# EAGLE board cpc_ram1m_74_v1.00 (EAGLE 6.4)
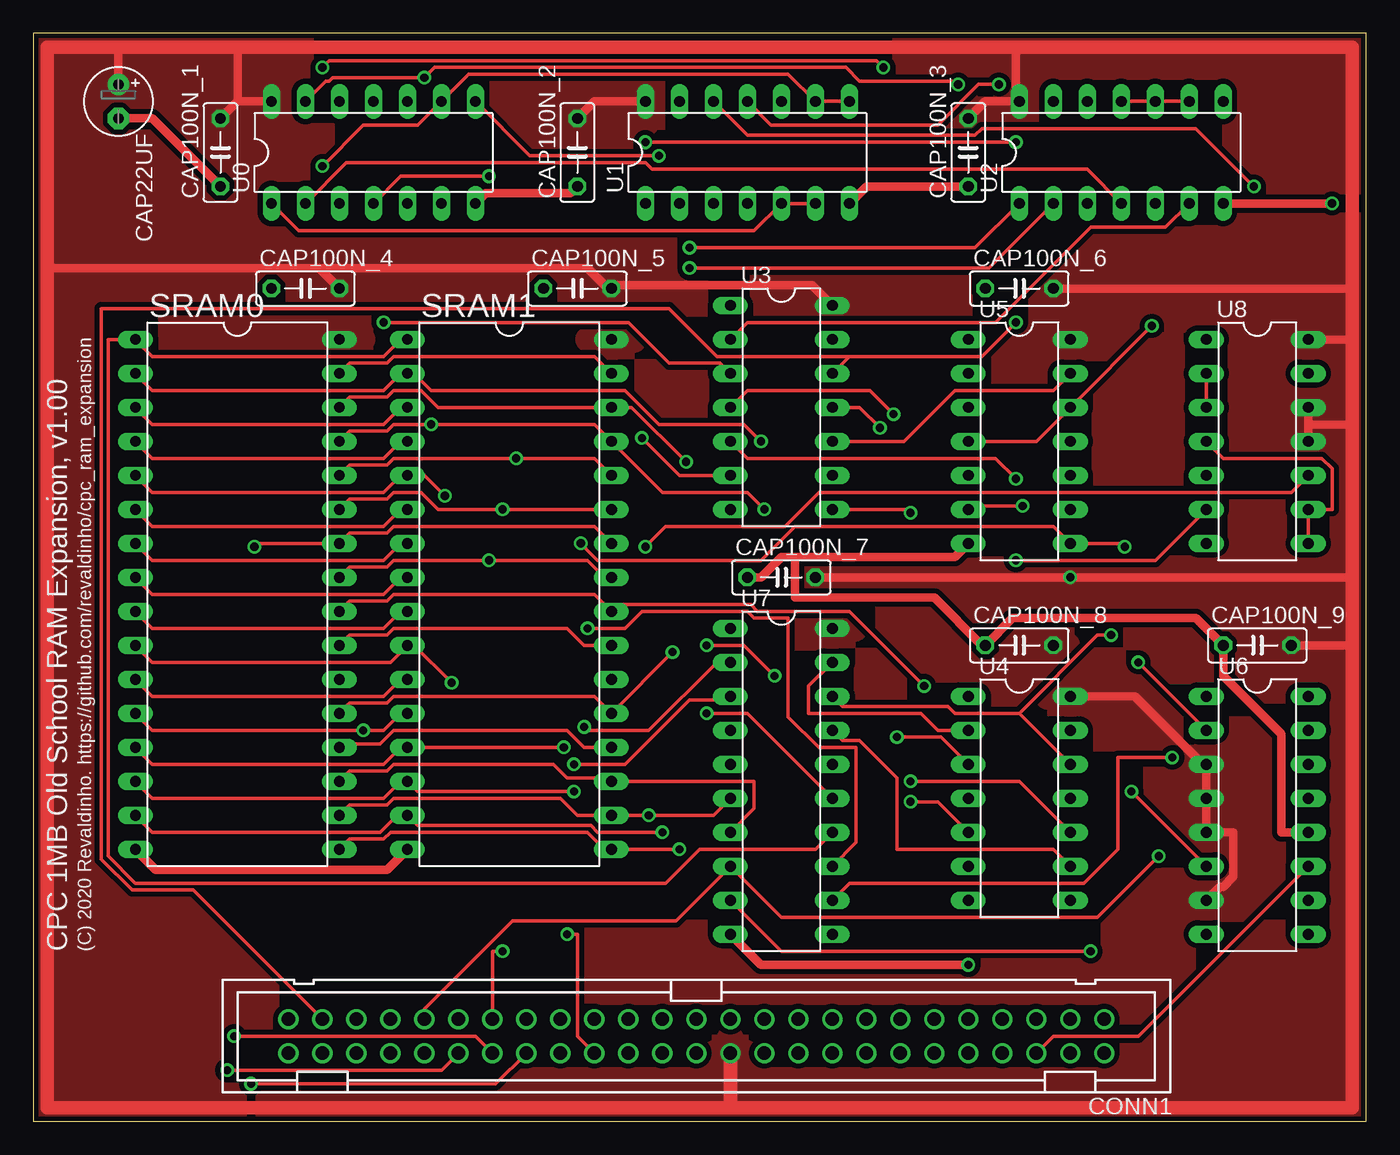
[diagram p0: board, top side]
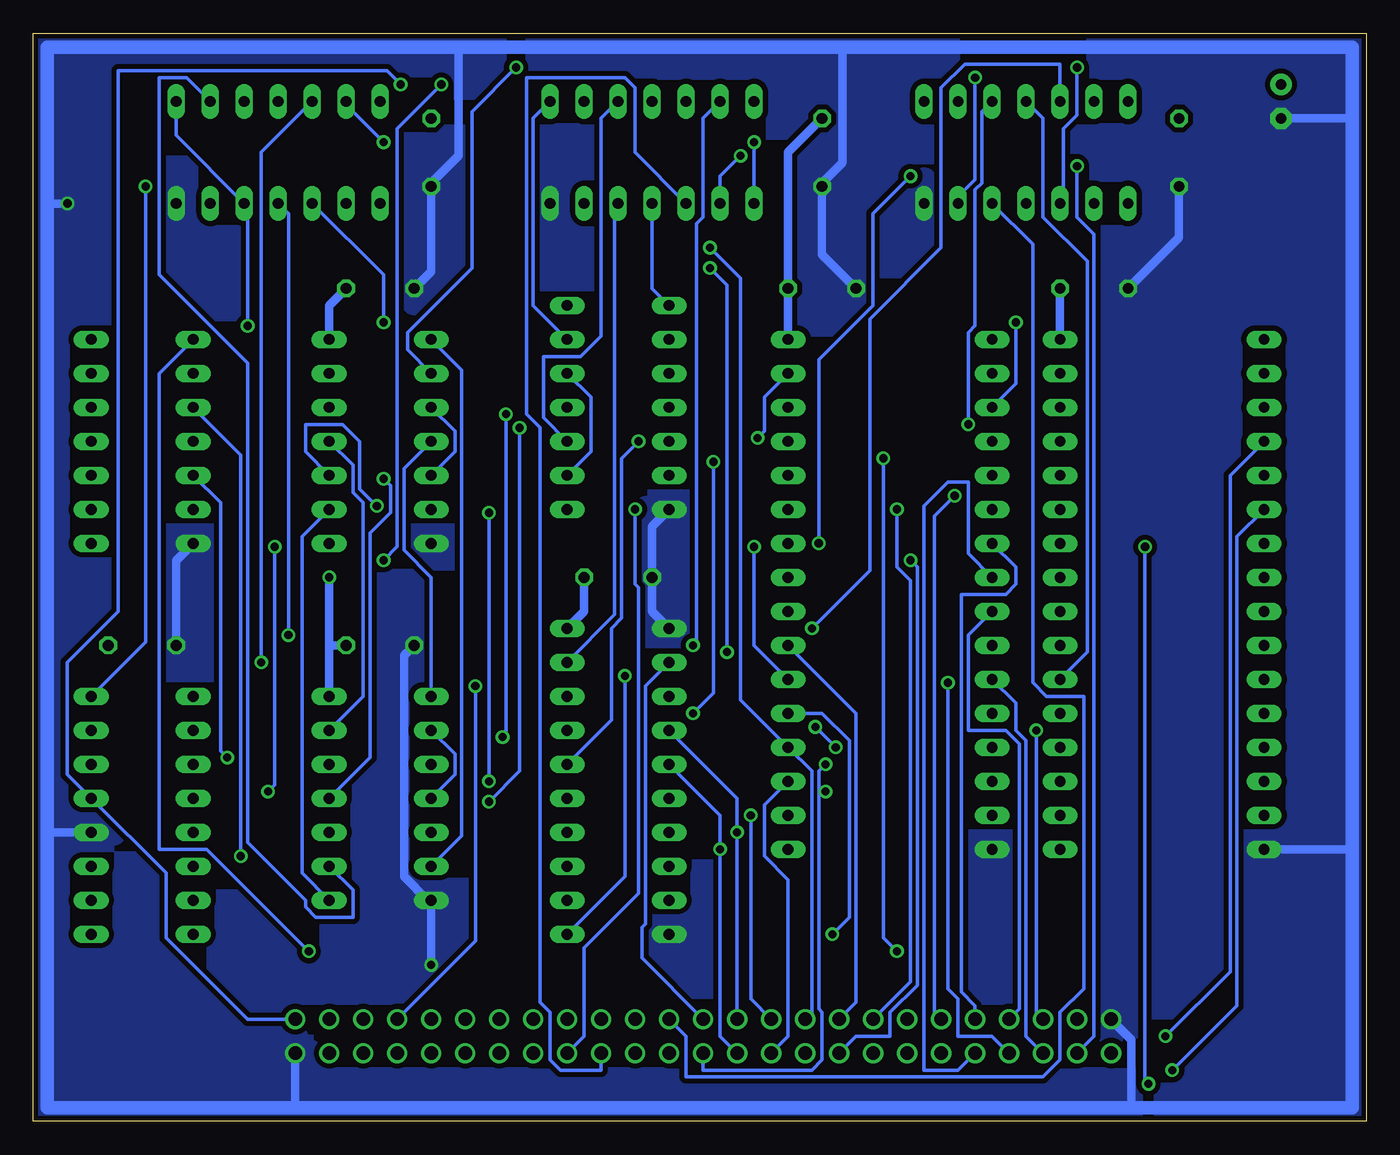
[diagram p1: board, bottom side, seen from below]

Size 99.57 x 81.28 mm. Coordinates in mm from the lower left corner, seen from the top.
Outline: 0,0 99.57,0 99.57,81.28 0,81.28 0,0
Copper layers (1*16): Top 0.035mm / dielectric 1.5mm / Bottom 0.035mm
Design rules "design_rules": minimum track width 10mil, minimum drill 24mil, track to track 8mil, track to pad 8mil, pad to pad 12mil, via to via 15mil, smd to smd 8mil, copper to edge 15mil, drill to drill 10mil, minimum pad ring 10mil, minimum via ring 8mil, stop-mask expansion 4mil, vias tented up to drill 0mil, thermal gap 10mil
Net classes: 0 signal: width 0.254 mm, clearance 0.254 mm; 1 supply: width 0.635 mm, clearance 0.381 mm

## Footprints (pad centres in the part's own frame; a part is rotated, then mirrored left to right if it is on the bottom)
E2,5-5 = drill 0.813 pad 1.6: + -1.27,0 | drill 0.813 pad 1.6 octagon: - 1.27,0
C050-025X075 = drill 0.813 octagon: 1 -2.54,0; 2 2.54,0
PAK100/2500-50 = drill 1 pad 1.422: 1 -30.48,-1.27; 2 -30.48,1.27; 3 -27.94,-1.27; 4 -27.94,1.27; 5 -25.4,-1.27; 6 -25.4,1.27; 7 -22.86,-1.27; 8 -22.86,1.27; 9 -20.32,-1.27; 10 -20.32,1.27; 11 -17.78,-1.27; 12 -17.78,1.27; 13 -15.24,-1.27; 14 -15.24,1.27; 15 -12.7,-1.27; 16 -12.7,1.27; 17 -10.16,-1.27; 18 -10.16,1.27; 19 -7.62,-1.27; 20 -7.62,1.27; 21 -5.08,-1.27; 22 -5.08,1.27; 23 -2.54,-1.27; 24 -2.54,1.27; 25 0,-1.27; 26 0,1.27; 27 2.54,-1.27; 28 2.54,1.27; 29 5.08,-1.27; 30 5.08,1.27; 31 7.62,-1.27; 32 7.62,1.27; 33 10.16,-1.27; 34 10.16,1.27; 35 12.7,-1.27; 36 12.7,1.27; 37 15.24,-1.27; 38 15.24,1.27; 39 17.78,-1.27; 40 17.78,1.27; 41 20.32,-1.27; 42 20.32,1.27; 43 22.86,-1.27; 44 22.86,1.27; 45 25.4,-1.27; 46 25.4,1.27; 47 27.94,-1.27; 48 27.94,1.27; 49 30.48,-1.27; 50 30.48,1.27
DIL32 = drill 0.813 long: 1 -19.05,-7.62; 2 -16.51,-7.62; 3 -13.97,-7.62; 4 -11.43,-7.62; 5 -8.89,-7.62; 6 -6.35,-7.62; 7 -3.81,-7.62; 8 -1.27,-7.62; 9 1.27,-7.62; 10 3.81,-7.62; 11 6.35,-7.62; 12 8.89,-7.62; 13 11.43,-7.62; 14 13.97,-7.62; 15 16.51,-7.62; 16 19.05,-7.62; 17 19.05,7.62; 18 16.51,7.62; 19 13.97,7.62; 20 11.43,7.62; 21 8.89,7.62; 22 6.35,7.62; 23 3.81,7.62; 24 1.27,7.62; 25 -1.27,7.62; 26 -3.81,7.62; 27 -6.35,7.62; 28 -8.89,7.62; 29 -11.43,7.62; 30 -13.97,7.62; 31 -16.51,7.62; 32 -19.05,7.62
DIL14 = drill 0.813 long: 1 -7.62,-3.81; 2 -5.08,-3.81; 3 -2.54,-3.81; 4 0,-3.81; 5 2.54,-3.81; 6 5.08,-3.81; 7 7.62,-3.81; 8 7.62,3.81; 9 5.08,3.81; 10 2.54,3.81; 11 0,3.81; 12 -2.54,3.81; 13 -5.08,3.81; 14 -7.62,3.81
DIL16 = drill 0.813 long: 1 -8.89,-3.81; 2 -6.35,-3.81; 3 -3.81,-3.81; 4 -1.27,-3.81; 5 1.27,-3.81; 6 3.81,-3.81; 7 6.35,-3.81; 8 8.89,-3.81; 9 8.89,3.81; 10 6.35,3.81; 11 3.81,3.81; 12 1.27,3.81; 13 -1.27,3.81; 14 -3.81,3.81; 15 -6.35,3.81; 16 -8.89,3.81
DIL20 = drill 0.813 long: 1 -11.43,-3.81; 2 -8.89,-3.81; 3 -6.35,-3.81; 4 -3.81,-3.81; 5 -1.27,-3.81; 6 1.27,-3.81; 7 3.81,-3.81; 8 6.35,-3.81; 9 8.89,-3.81; 10 11.43,-3.81; 11 11.43,3.81; 12 8.89,3.81; 13 6.35,3.81; 14 3.81,3.81; 15 1.27,3.81; 16 -1.27,3.81; 17 -3.81,3.81; 18 -6.35,3.81; 19 -8.89,3.81; 20 -11.43,3.81

## Placement (x,y rotation side)
CAP22UF  [E2,5-5]  6.35,76.2 270 top
CAP100N_1  [C050-025X075]  13.97,72.39 90 top
CAP100N_2  [C050-025X075]  40.64,72.39 90 top
CAP100N_3  [C050-025X075]  69.85,72.39 90 top
CAP100N_4  [C050-025X075]  20.32,62.23 0 top
CAP100N_5  [C050-025X075]  40.64,62.23 0 top
CAP100N_6  [C050-025X075]  73.66,62.23 0 top
CAP100N_7  [C050-025X075]  55.88,40.64 0 top
CAP100N_8  [C050-025X075]  73.66,35.56 0 top
CAP100N_9  [C050-025X075]  91.44,35.56 0 top
CONN1  [PAK100/2500-50]  49.53,6.35 180 top
SRAM0  [DIL32]  15.24,39.37 270 top
SRAM1  [DIL32]  35.56,39.37 270 top
U0  [DIL14]  25.4,72.39 0 top
U1  [DIL14]  53.34,72.39 0 top
U2  [DIL14]  81.28,72.39 0 top
U3  [DIL14]  55.88,53.34 270 top
U4  [DIL14]  73.66,24.13 270 top
U5  [DIL14]  73.66,50.8 270 top
U6  [DIL16]  91.44,22.86 270 top
U7  [DIL20]  55.88,25.4 270 top
U8  [DIL14]  91.44,50.8 270 top

## Library data of the parts
CAP22UF CAP100N_1-CAP100N_9 = resistor
CONN1 = con-3m
SRAM0 SRAM1 U0 U1-U8 = ic-package

## Nets
A0: CONN1.33 SRAM0.23 SRAM1.23
A1: CONN1.34 SRAM0.25 SRAM1.25
A2: CONN1.35 SRAM0.27 SRAM1.27
A3: CONN1.36 SRAM0.26 SRAM1.26
A4: CONN1.37 SRAM0.28 SRAM1.28
A5: CONN1.38 SRAM0.4 SRAM1.4
A6: CONN1.39 SRAM0.5 SRAM1.5
A7: CONN1.40 SRAM0.6 SRAM1.6
A8: CONN1.41 SRAM0.7 SRAM1.7 U7.8 U8.2 U8.3
A8_B: U7.9 U8.1
A8_Q: U0.12 U7.13
A8_QB: U7.12 U8.5
A9: CONN1.42 SRAM0.8 SRAM1.8
A10: CONN1.43 SRAM0.9 SRAM1.9
A11: CONN1.44 SRAM0.10 SRAM1.10
A12: CONN1.45 SRAM0.12 SRAM1.12
A13: CONN1.46 SRAM0.11 SRAM1.11
A14: CONN1.47 U2.3 U3.9 U3.12
A15: CONN1.48 U0.9 U1.8 U1.9 U3.13
BUSACK_B: CONN1.13
BUSRESET_B: CONN1.11
BUSRQ_B: CONN1.14
CLK: CONN1.1 U1.11 U6.13
CLKENB_LAT_Q: U1.12 U6.16
CURSOR: CONN1.5
D0: CONN1.25 SRAM0.13 SRAM1.13 U7.2
D1: CONN1.26 SRAM0.14 SRAM1.14 U7.3
D2: CONN1.27 SRAM0.15 SRAM1.15 U7.4
D3: CONN1.28 SRAM0.17 SRAM1.17 U7.5
D4: CONN1.29 SRAM0.18 SRAM1.18 U7.6
D5: CONN1.30 SRAM0.19 SRAM1.19 U7.7
D6: CONN1.31 SRAM0.20 SRAM1.20 U2.1
D7: CONN1.32 SRAM0.21 SRAM1.21 U2.2
EXP_B: CONN1.3
EXTRAM_B: U0.4 U5.8 U6.6
HALT_B: CONN1.17
INT_B: CONN1.16
IOREQ_B: CONN1.20 U1.3
LPEN: CONN1.4
M1_B: CONN1.22
MREQ_B: CONN1.23 U0.5
N14: U2.12 U6.2
N15: U1.1 U2.13
N16: U2.6 U3.2
N17: U1.4 U3.1
N18: U4.13 U5.11
N19: U3.5 U4.11
N20: U3.4 U4.3
N21: U1.10 U3.10 U5.13
N22: U3.8 U4.10
N23: U3.11 U4.5
N24: U0.3 U5.2
N25: U4.6 U5.1
N26: U5.3 U5.5
N27: U2.5 U2.8 U4.1 U5.4 U5.12
N28: U5.6 U5.10
N29: U4.8 U5.9
NMI_B: CONN1.15
NN1: U0.8 U1.2
RAMADRHI0: SRAM0.3 SRAM1.3 U3.3
RAMADRHI1: SRAM0.31 SRAM1.31 U3.6
RAMADRHI2: SRAM0.2 SRAM1.2 U7.16
RAMADRHI3: SRAM0.30 SRAM1.30 U7.15
RAMADRHI4: SRAM0.1 SRAM1.1 U7.14
RAMBLOCK_Q0: U0.1 U1.5 U1.6 U4.2 U4.4 U7.19
RAMBLOCK_Q1: U0.2 U2.4 U4.12 U7.18
RAMBLOCK_Q2: U2.9 U2.10 U2.11 U4.9 U7.17
RAMCS0_B: SRAM0.22 U0.11
RAMCS1: U8.4 U8.8 U8.9
RAMCS1_B: SRAM1.22 U8.10
RAMCS_B: U0.6 U0.13 U8.6
RAMDIS: CONN1.6 U6.11
RAMRD_B: CONN1.7 SRAM0.24 SRAM1.24
RD_B: CONN1.19
READY: CONN1.12
RESET_B: CONN1.10
RFSH_B: CONN1.21
ROMDIS: CONN1.8
ROMEN_B: CONN1.9
SOUND: CONN1.50
VDD [supply]: CAP22UF.+ CAP100N_1.2 CAP100N_2.2 CAP100N_3.2 CAP100N_4.2 CAP100N_5.2 CAP100N_6.2 CAP100N_7.2 CAP100N_8.2 CAP100N_9.2 CONN1.24 SRAM0.32 SRAM1.32 U0.14 U1.14 U2.14 U3.14 U4.14 U5.14 U6.3 U6.4 U6.5 U6.7 U7.20 U8.11 U8.12 U8.14
VSS [supply]: CAP22UF.- CAP100N_1.1 CAP100N_2.1 CAP100N_3.1 CAP100N_4.1 CAP100N_5.1 CAP100N_6.1 CAP100N_7.1 CAP100N_8.1 CAP100N_9.1 CONN1.2 CONN1.49 SRAM0.16 SRAM1.16 U0.7 U1.7 U2.7 U3.7 U4.7 U5.7 U6.12 U7.1 U7.10 U8.7
WCLK_B: U1.13 U7.11
WR_B: CONN1.18 SRAM0.29 SRAM1.29 U0.10

## Tracks (layer width: path | path; a pad name or v marks a point on that pad's centre or on a via)
A0
  Top 0.254: SRAM0.23 23.62,36.32 26.42,36.32 26.92,36.83 39.88,36.83 41.15,35.56 SRAM1.23
  Bottom 0.254: CONN1.33 38.1,8.89 38.1,30.48 SRAM1.23
A1  (via drill 0.61)
  Top 0.254: SRAM0.25 23.62,41.4 26.42,41.4 26.92,41.91 v34.04,41.91 41.4,41.91 42.67,40.64 SRAM1.25
  Bottom 0.254: CONN1.34 38.1,6.35 35.56,6.35 35.56,8.13 33.53,10.16 33.53,41.4 v34.04,41.91
A2  (via drill 0.61)
  Top 0.254: SRAM0.27 23.62,46.48 26.42,46.48 26.92,46.99 28.96,46.99 30.23,45.72 v35.05,45.72 SRAM1.27
  Bottom 0.254: CONN1.35 34.04,10.41 34.04,40.39 35.05,41.4 v35.05,45.72
A3  (via drill 0.61)
  Top 0.254: SRAM1.26 41.91,44.45 26.92,44.45 26.42,43.94 23.62,43.94 SRAM0.26 16.76,43.18 v16.51,42.93 | CONN1.36 34.54,2.79 v16.26,2.79
  Bottom 0.254: v16.26,2.79 16.51,3.05 v16.51,42.93
A4  (via drill 0.61)
  Top 0.254: SRAM0.28 23.62,49.02 26.42,49.02 26.92,49.53 v36.07,49.53 41.91,49.53 SRAM1.28 | CONN1.37 34.29,12.7 v35.05,12.7
  Bottom 0.254: v35.05,12.7 36.07,13.72 v36.07,49.53
A5  (via drill 0.61)
  Top 0.254: SRAM0.4 8.89,49.53 26.16,49.53 27.43,50.8 SRAM1.4 | CONN1.38 33.02,6.35 v14.99,6.35
  Bottom 0.254: v14.99,6.35 10.16,11.18 10.16,48.26 SRAM0.4
A6  (via drill 0.61)
  Top 0.254: SRAM0.5 8.89,46.99 26.16,46.99 27.43,48.26 SRAM1.5 29.21,48.26 v30.73,46.74
  Bottom 0.254: CONN1.39 32.26,8.13 32.26,45.21 v30.73,46.74
A7  (via drill 0.61)
  Top 0.254: SRAM0.6 8.89,44.45 26.16,44.45 27.43,45.72 SRAM1.6 | CONN1.40 30.48,3.81 v14.48,3.81
  Bottom 0.254: v14.48,3.81 9.65,8.64 9.65,43.69 SRAM0.6
A8  (via drill 0.61)
  Top 0.254: SRAM0.7 8.89,41.91 26.16,41.91 27.43,43.18 SRAM1.7 | U8.2 U8.3 | CONN1.41 29.21,8.38 35.81,14.99 48.01,14.99 U7.8 55.88,15.24 79.5,15.24 v84.07,19.81
  Bottom 0.254: U8.3 84.07,49.78 v84.07,19.81 | SRAM1.7 26.16,41.4 26.16,40.13 26.92,39.37 30.23,39.37 30.23,9.65 29.21,8.64 CONN1.41
A8_B  (via drill 0.61)
  Top 0.254: U7.9 55.88,12.7 v78.99,12.7
  Bottom 0.254: v78.99,12.7 86.61,20.32 90.17,20.32 90.17,55.88 U8.1
A8_Q  (via drill 0.61)
  Top 0.254: U7.13 61.47,20.83 61.47,27.94 58.67,27.94 56.39,30.23 56.39,37.59 53.85,37.59 53.34,38.1 45.47,38.1 44.2,36.83 v41.4,36.83
  Bottom 0.254: v41.4,36.83 37.08,41.15 37.08,59.94 31.75,65.28 31.75,77.22 29.97,78.99 22.86,78.99 U0.12
A8_QB  (via drill 0.61)
  Top 0.254: U7.12 60.96,17.78 78.49,17.78 81.03,20.32 81.03,27.18 v85.09,27.18
  Bottom 0.254: v85.09,27.18 85.6,27.69 85.6,46.23 U8.5
A9
  Top 0.254: SRAM0.8 8.89,39.37 26.16,39.37 27.43,40.64 SRAM1.8
  Bottom 0.254: CONN1.42 30.48,3.81 33.02,3.81 33.02,45.97 31.24,47.75 29.72,47.75 29.72,42.42 SRAM1.8
A10
  Top 0.254: SRAM0.9 8.89,36.83 26.16,36.83 27.43,38.1 SRAM1.9
  Bottom 0.254: CONN1.43 25.91,8.38 25.91,28.19 26.92,29.21 29.72,29.21 29.72,36.32 SRAM1.9
A11  (via drill 0.61)
  Top 0.254: SRAM0.10 8.89,34.29 26.67,34.29 SRAM1.10 28.45,35.56 v31.24,32.77
  Bottom 0.254: CONN1.44 27.94,6.35 30.48,6.35 30.48,9.14 31.24,9.91 v31.24,32.77
A12  (via drill 0.61)
  Top 0.254: SRAM0.12 8.89,29.21 v24.64,29.21 26.16,29.21 27.43,30.48 SRAM1.12
  Bottom 0.254: CONN1.45 24.64,8.13 v24.64,29.21
A13
  Top 0.254: SRAM0.11 8.89,31.75 26.16,31.75 27.43,33.02 SRAM1.11
  Bottom 0.254: CONN1.46 25.4,6.35 25.4,28.45 26.16,29.21 26.16,31.24 SRAM1.11
A14  (via drill 0.61)
  Top 0.254: v73.41,59.69 70.87,57.15 60.96,57.15 | U3.12 60.96,57.15 | CONN1.47 11.94,17.27 7.37,17.27 5.08,19.56 5.08,60.71 47.5,60.71 51.05,57.15 60.96,57.15
  Bottom 0.254: U3.9 57.91,50.04 57.91,54.1 U3.12 | U2.3 73.41,63.25 v73.41,59.69
A15  (via drill 0.61)
  Top 0.254: v21.59,71.37 24.64,74.42 28.7,74.42 U0.9 32.51,78.23 56.39,78.23 U1.9 U1.8
  Bottom 0.254: U3.13 62.23,60.96 62.23,74.93 U1.8 | CONN1.48 20.32,6.35 20.32,66.29 21.59,67.56 v21.59,71.37
CLK  (via drill 0.61)
  Top 0.254: U1.11 55.12,74.42 67.56,74.42 70.61,77.47 v72.14,77.47
  Bottom 0.254: CONN1.1 83.57,7.62 89.66,13.72 89.66,18.54 U6.13 97.03,25.91 97.03,34.29 93.22,38.1 93.22,78.49 73.15,78.49 v72.14,77.47
CLKENB_LAT_Q  (via drill 0.61)
  Top 0.254: v91.19,69.85 86.87,74.17 70.87,74.17 70.36,73.66 53.34,73.66 U1.12
  Bottom 0.254: U6.16 91.19,35.81 v91.19,69.85
D0  (via drill 0.61)
  Top 0.254: SRAM0.13 8.89,26.67 26.16,26.67 27.43,27.94 SRAM1.13 v39.62,27.94 | v41.15,29.46 41.4,29.21 45.97,29.21 51.05,34.29 U7.2
  Bottom 0.254: U7.2 53.85,32.51 53.85,14.73 54.1,14.48 54.1,12.19 CONN1.25 | v41.15,29.46 v39.62,27.94
D1  (via drill 0.61)
  Top 0.254: SRAM0.14 8.89,24.13 26.16,24.13 27.43,25.4 SRAM1.14 28.7,24.64 v40.39,24.64 | U7.3 51.82,31.5 49.02,31.5 44.2,26.67 v40.39,26.67
  Bottom 0.254: v40.39,26.67 40.89,26.16 40.89,24.64 | 40.89,24.64 40.89,8.38 40.64,8.13 40.64,4.57 41.4,3.81 49.53,3.81 CONN1.26 | 40.89,24.64 v40.39,24.64
D2  (via drill 0.61)
  Top 0.254: SRAM0.15 8.89,21.59 25.91,21.59 27.18,22.86 SRAM1.15 28.7,22.1 41.66,22.1 42.16,21.59 v46.99,21.59
  Bottom 0.254: U7.4 46.99,24.13 v46.99,21.59 CONN1.27
D3  (via drill 0.61)
  Top 0.254: SRAM0.17 23.62,21.08 26.16,21.08 26.67,21.59 41.4,21.59 42.67,20.32 SRAM1.17 v48.26,20.32
  Bottom 0.254: U7.5 48.26,22.86 v48.26,20.32 48.26,6.35 CONN1.28
D4  (via drill 0.61)
  Top 0.254: SRAM0.18 23.62,23.62 26.42,23.62 26.92,24.13 39.37,24.13 40.64,22.86 SRAM1.18 v45.97,22.86 50.8,22.86 U7.6
  Bottom 0.254: CONN1.29 45.97,9.14 v45.97,22.86
D5
  Top 0.254: SRAM0.19 23.62,26.16 26.42,26.16 26.92,26.67 38.86,26.67 39.88,25.65 42.93,25.65 SRAM1.19 53.85,25.4 53.85,23.37 U7.7
  Bottom 0.254: CONN1.30 43.18,6.35 43.18,18.03 44.96,19.81 44.96,23.62 SRAM1.19
D6  (via drill 0.61)
  Top 0.254: SRAM0.20 23.11,28.19 25.91,28.19 26.92,29.21 39.88,29.21 41.15,27.94 SRAM1.20 | U2.1 70.36,65.28 v49.02,65.28
  Bottom 0.254: v49.02,65.28 46.74,62.99 46.74,31.5 SRAM1.20 41.4,26.16 41.4,8.13 CONN1.31
D7  (via drill 0.61)
  Top 0.254: SRAM0.21 23.62,31.24 26.42,31.24 26.92,31.75 41.91,31.75 SRAM1.21 v47.75,35.05 | U2.2 71.37,63.75 v49.02,63.75 | CONN1.32 40.64,6.35 40.64,13.97 v39.88,13.97
  Bottom 0.254: v49.02,63.75 47.75,62.48 v47.75,35.05 | v39.88,13.97 38.61,15.24 38.61,28.45 40.64,30.48 SRAM1.21
EXTRAM_B  (via drill 0.61)
  Top 0.254: U0.4 27.43,70.61 v34.04,70.61 | v40.89,43.18 42.16,41.91 54.36,41.91 56.9,44.45 76.2,44.45 U5.8 81.28,43.18 v81.53,42.93 | v82.04,24.64 U6.6
  Bottom 0.254: v34.04,70.61 36.83,67.82 36.83,60.96 40.89,56.9 v40.89,43.18 | v82.04,24.64 81.53,25.15 v81.53,42.93
IOREQ_B
  Bottom 0.254: U1.3 54.61,72.39 54.61,77.22 55.37,77.98 62.74,77.98 62.74,52.83 61.72,51.82 61.72,8.89 60.96,8.13 60.96,4.57 60.2,3.81 57.15,3.81 CONN1.20
MREQ_B
  Bottom 0.254: U0.5 24.89,65.53 24.89,32.77 23.88,31.75 21.08,31.75 21.08,9.91 22.86,8.13 22.86,4.57 24.13,3.3 50.8,3.3 50.8,6.35 CONN1.23
N14  (via drill 0.61)
  Top 0.254: v82.55,34.29 U6.2
  Bottom 0.254: v82.55,34.29 82.55,72.39 U2.12
N15  (via drill 0.61)
  Top 0.254: v73.41,73.15 v45.72,73.15
  Bottom 0.254: v45.72,73.15 U1.1 | v73.41,73.15 76.2,75.95 U2.13
N16
  Top 0.254: U3.2 53.34,59.69 71.88,59.69 78.99,66.8 84.58,66.8 U2.6
N17
  Bottom 0.254: U3.1 53.34,62.23 U1.4
N18
  Bottom 0.254: U4.13 74.93,31.75 74.93,46.23 75.69,46.99 75.69,49.02 U5.11
N19  (via drill 0.61)
  Top 0.254: v73.41,48.01 71.88,49.53 53.34,49.53 U3.5
  Bottom 0.254: U4.11 74.42,27.18 74.42,43.94 72.9,45.47 72.9,47.5 v73.41,48.01
N20  (via drill 0.61)
  Top 0.254: U4.3 67.82,28.7 v64.52,28.7 | v64.26,52.83 62.48,54.61 53.34,54.61 U3.4
  Bottom 0.254: v64.52,28.7 64.26,28.96 v64.26,52.83
N21
  Top 0.254: U3.10 65.02,50.8 68.83,54.61 76.2,54.61 U5.13
  Bottom 0.254: U1.10 57.15,74.93 57.15,58.67 58.67,57.15 61.47,57.15 61.47,52.58 U3.10
N22  (via drill 0.61)
  Top 0.254: U4.10 73.66,25.4 v65.53,25.4 | v65.53,45.47 65.28,45.72 U3.8
  Bottom 0.254: v65.53,45.47 v65.53,25.4
N23  (via drill 0.61)
  Top 0.254: U4.5 67.56,23.88 v65.53,23.88 | v63.25,51.82 61.72,53.34 U3.11
  Bottom 0.254: v65.53,23.88 63.25,26.16 v63.25,51.82
N24  (via drill 0.61)
  Top 0.254: v21.59,78.74 22.1,79.25 62.99,79.25 v63.5,78.74
  Bottom 0.254: U0.3 22.61,68.83 22.61,74.17 21.59,75.18 v21.59,78.74 | v63.5,78.74 66.8,75.44 66.8,63.75 71.63,58.93 71.63,57.66 U5.2
N25
  Bottom 0.254: U4.6 67.56,21.34 67.56,56.13 U5.1
N26
  Bottom 0.254: U5.5 68.07,50.04 68.07,51.56 U5.3
N27  (via drill 0.61)
  Top 0.254: U5.4 74.93,50.8 U5.12 v83.57,59.44
  Bottom 0.254: U2.8 88.9,73.66 U2.5 83.57,68.33 v83.57,59.44 | U4.1 69.85,40.64 71.88,42.67 71.88,48.77 U5.4
N28  (via drill 0.61)
  Top 0.254: U5.6 70.1,45.97 v73.91,45.97
  Bottom 0.254: v73.91,45.97 75.18,47.24 75.18,50.8 76.45,52.07 79.25,52.07 79.25,50.04 U5.10
N29
  Bottom 0.254: U4.8 79.5,18.54 79.5,43.69 U5.9
NN1  (via drill 0.61)
  Top 0.254: U0.8 37.08,72.14 v46.74,72.14
  Bottom 0.254: v46.74,72.14 48.26,70.61 U1.2
RAMADRHI0  (via drill 0.61)
  Top 0.254: SRAM0.3 8.89,52.07 26.16,52.07 27.43,53.34 SRAM1.3 | U3.3 51.31,56.64 47.5,56.64 44.45,59.69 v26.16,59.69
  Bottom 0.254: v26.16,59.69 26.16,55.12 SRAM1.3
RAMADRHI1  (via drill 0.61)
  Top 0.254: SRAM0.31 23.62,56.64 26.42,56.64 26.92,57.15 41.91,57.15 SRAM1.31 | U3.6 48.26,48.26 v45.47,51.05
  Bottom 0.254: v45.47,51.05 44.96,51.56 44.96,54.1 SRAM1.31
RAMADRHI2  (via drill 0.61)
  Top 0.254: SRAM0.2 8.89,54.61 26.16,54.61 27.43,55.88 SRAM1.2 28.45,55.88 29.72,54.61 44.2,54.61 46.74,52.07 53.09,52.07 v54.36,50.8
  Bottom 0.254: U7.16 56.39,29.97 56.39,36.83 55.63,37.59 55.63,49.53 v54.36,50.8
RAMADRHI3  (via drill 0.61)
  Top 0.254: SRAM0.30 23.62,54.1 26.42,54.1 26.92,54.61 28.96,54.61 30.23,53.34 SRAM1.30 44.7,53.34 v48.77,49.28 | U7.15 53.34,30.48 v50.29,30.48
  Bottom 0.254: v50.29,30.48 48.77,32 v48.77,49.28
RAMADRHI4
  Top 0.254: SRAM1.1 27.43,58.42 26.16,57.15 8.89,57.15 SRAM0.1 5.59,58.42 5.59,19.81 7.62,17.78 47.24,17.78 49.78,20.32 58.42,20.32 U7.14
RAMBLOCK_Q0
  Top 0.254: U7.19 57.91,32.51 57.91,30.48 66.29,30.48 67.56,29.21 U4.2 | U0.1 19.81,66.55 53.85,66.55 U1.5 U1.6
  Bottom 0.254: U4.4 68.07,25.91 68.07,27.43 U4.2 | U7.19 56.13,37.85 56.13,68.33 U1.5
RAMBLOCK_Q1  (via drill 0.61)
  Top 0.254: U7.18 60.45,30.99 68.33,30.99 68.83,30.48 73.66,30.48 | U4.12 73.66,30.48 | U0.2 23.37,71.63 45.72,71.63 46.23,71.12 78.74,71.12 U2.4 | 73.66,30.48 79.5,36.32 v80.52,36.32
  Bottom 0.254: v80.52,36.32 80.52,67.82 U2.4
RAMBLOCK_Q2
  Top 0.254: U2.11 U2.10 U2.9 | U7.17 60.45,28.45 61.72,28.45 64.52,25.65 64.52,20.32 76.2,20.32 U4.9
  Bottom 0.254: U2.9 88.14,77.98 90.17,77.98 90.17,63.25 83.57,56.64 83.57,20.83 79.25,16.51 79.25,16 78.49,15.24 75.69,15.24 75.69,17.27 U4.9
RAMCS0_B
  Bottom 0.254: SRAM0.22 20.83,35.05 20.83,64.26 24.13,67.56 24.13,74.93 U0.11
RAMCS1
  Top 0.254: U8.8 U8.9 97.03,45.72 97.03,48.77 96.27,49.53 88.9,49.53 U8.4
RAMCS1_B  (via drill 0.61)
  Top 0.254: v45.72,42.93 47.24,44.45 56.13,44.45 58.67,46.99 93.98,46.99 U8.10
  Bottom 0.254: SRAM1.22 45.72,35.56 v45.72,42.93
RAMCS_B  (via drill 0.61)
  Top 0.254: U0.13 21.84,77.72 22.1,77.72 22.35,77.98 v29.21,77.98 29.97,78.74 60.71,78.74 61.72,77.72 68.83,77.72 v69.09,77.47 | U8.6 83.82,41.91 v73.41,41.91
  Bottom 0.254: v29.21,77.98 29.21,70.36 30.48,69.09 U0.6 | v73.41,41.91 72.39,42.93 72.39,74.17 v69.09,77.47
RAMDIS
  Top 0.254: U6.11 82.55,6.35 76.2,6.35 CONN1.6
RAMRD_B  (via drill 0.61)
  Top 0.254: SRAM0.24 23.62,38.86 26.42,38.86 26.92,39.37 41.91,39.37 42.67,38.61 | v66.55,32.51 60.96,38.1 54.1,38.1 53.59,38.61 42.67,38.61 | 42.67,38.61 SRAM1.24
  Bottom 0.254: CONN1.7 66.55,13.46 v66.55,32.51
VDD  (via drill 0.61)
  Top 0.635: CAP100N_7.2 98.55,40.64 | CAP100N_6.2 98.55,62.23 | CAP100N_2.2 41.91,76.2 U1.14 | U3.14 58.17,62.48 43.43,62.48 CAP100N_5.2 42.93,62.23 41.4,63.75 21.59,63.75 21.46,63.63 | U6.7 88.65,17.53 88.9,17.53 89.66,18.29 89.66,21.59 U6.5 U6.4 U6.3 87.38,26.67 82.3,31.75 U4.14 | CAP100N_3.2 71.12,76.2 U2.14 73.41,76.45 73.41,80.26 | 15.24,76.2 CAP100N_1.2 | U0.14 15.24,76.2 | U8.12 95.25,52.07 | 95.25,52.07 U8.11 | 98.55,35.56 CAP100N_9.2 | 98.55,58.42 U8.14 | 6.35,80.26 CAP22UF.+ | 98.55,52.07 95.25,52.07 | 21.46,63.63 21.34,63.75 1.02,63.75 | 21.46,63.63 CAP100N_4.2 | 15.24,80.26 15.24,76.2
  Top 1.016: 52.07,1.02 1.02,1.02 1.02,63.75 1.02,80.26 6.35,80.26 15.24,80.26 73.41,80.26 98.55,80.26 98.55,62.23 98.55,58.42 98.55,52.07 98.55,40.64 98.55,35.56 98.55,1.02 52.07,1.02 | CONN1.24 52.07,1.02
  Bottom 0.635: v77.47,40.64 77.47,35.56 | 77.47,35.56 U4.14 | SRAM1.32 CAP100N_5.2 43.18,72.39 CAP100N_2.2 | CAP100N_4.2 SRAM0.32 | 77.47,35.56 CAP100N_8.2 | CAP100N_6.2 77.47,60.96 U5.14 | U7.20 58.42,38.1 CAP100N_7.2
  pour Top: 0,0 0,81.28 99.06,81.28 99.06,0
VSS  (via drill 0.61)
  Top 0.635: U5.7 68.83,42.16 56.9,42.16 | 56.9,42.16 55.88,42.16 54.36,40.64 CAP100N_7.1 | U7.10 54.36,11.68 v69.85,11.68 | 56.9,42.16 56.9,39.12 67.31,39.12 70.87,35.56 CAP100N_8.1 73.15,37.59 86.87,37.59 CAP100N_9.1 88.9,33.27 93.22,28.96 93.22,21.59 U6.12 | U1.7 62.23,69.85 CAP100N_3.1 | U0.7 33.78,69.34 40.13,69.34 CAP100N_2.1 | SRAM1.16 26.42,18.8 9.14,18.8 SRAM0.16 | v97.03,68.58 U2.7 | CAP100N_1.1 8.89,74.93 CAP22UF.-
  Bottom 0.635: U7.1 53.34,38.1 CAP100N_7.1 53.34,44.45 U3.7 | v69.85,11.68 U4.7 70.1,16.51 71.88,18.29 71.88,34.8 CAP100N_8.1 | U8.7 88.9,41.91 CAP100N_9.1 | CAP100N_6.1 69.85,63.5 CAP100N_3.1 69.85,70.1 67.82,72.14 67.82,80.26 | CAP100N_5.1 40.64,64.77 CAP100N_2.1 40.64,70.1 39.12,71.63 39.12,80.26 | CAP100N_4.1 13.97,66.04 CAP100N_1.1 | 1.02,20.32 SRAM0.16 | 98.55,21.59 U6.12 | 98.55,68.58 v97.03,68.58 | 80.01,1.02 CONN1.2 | CONN1.49 17.53,6.1 17.53,1.02 | 1.02,74.93 CAP22UF.-
  Bottom 1.016: 1.02,1.02 17.53,1.02 80.01,1.02 98.55,1.02 98.55,21.59 98.55,68.58 98.55,80.26 67.82,80.26 39.12,80.26 1.02,80.26 1.02,74.93 1.02,20.32 1.02,1.02
  pour Bottom: 0,0 0,81.28 99.06,81.28 99.06,0
WCLK_B  (via drill 0.61)
  Top 0.254: v55.37,33.27 53.09,35.56 v50.29,35.56
  Bottom 0.254: U7.11 55.37,18.29 v55.37,33.27 | v50.29,35.56 50.04,35.81 50.04,67.06 49.53,67.56 49.53,74.93 U1.13
WR_B  (via drill 0.61)
  Top 0.254: SRAM0.29 23.62,51.56 26.42,51.56 26.92,52.07 v29.72,52.07 41.91,52.07 SRAM1.29 46.99,46.99 53.34,46.99 v54.61,45.72
  Bottom 0.254: U0.10 28.7,75.44 28.7,70.1 29.21,69.6 29.21,59.44 29.72,58.93 v29.72,52.07 | CONN1.18 58.42,6.35 58.42,12.95 54.36,17.02 54.36,39.88 54.61,40.13 v54.61,45.72

## Text on the board
tPlace: CPC 1MB Old School RAM Expansion, v1.00 | (C) 2020 Revaldinho. https://github.com/revaldinho/cpc_ram_expansion